# Altium PCB CEM3340_vco.PcbDoc (part 1 of 2)
Units mm, origin at the board's own origin, x right, y up, seen from the top; angles counter-clockwise.
Board outline 94 x 100 mm, 2 copper layers (Top Layer, Bottom Layer), stack 1.584 mm thick; 145 components, 81 nets, 415 pads, 466 vias.
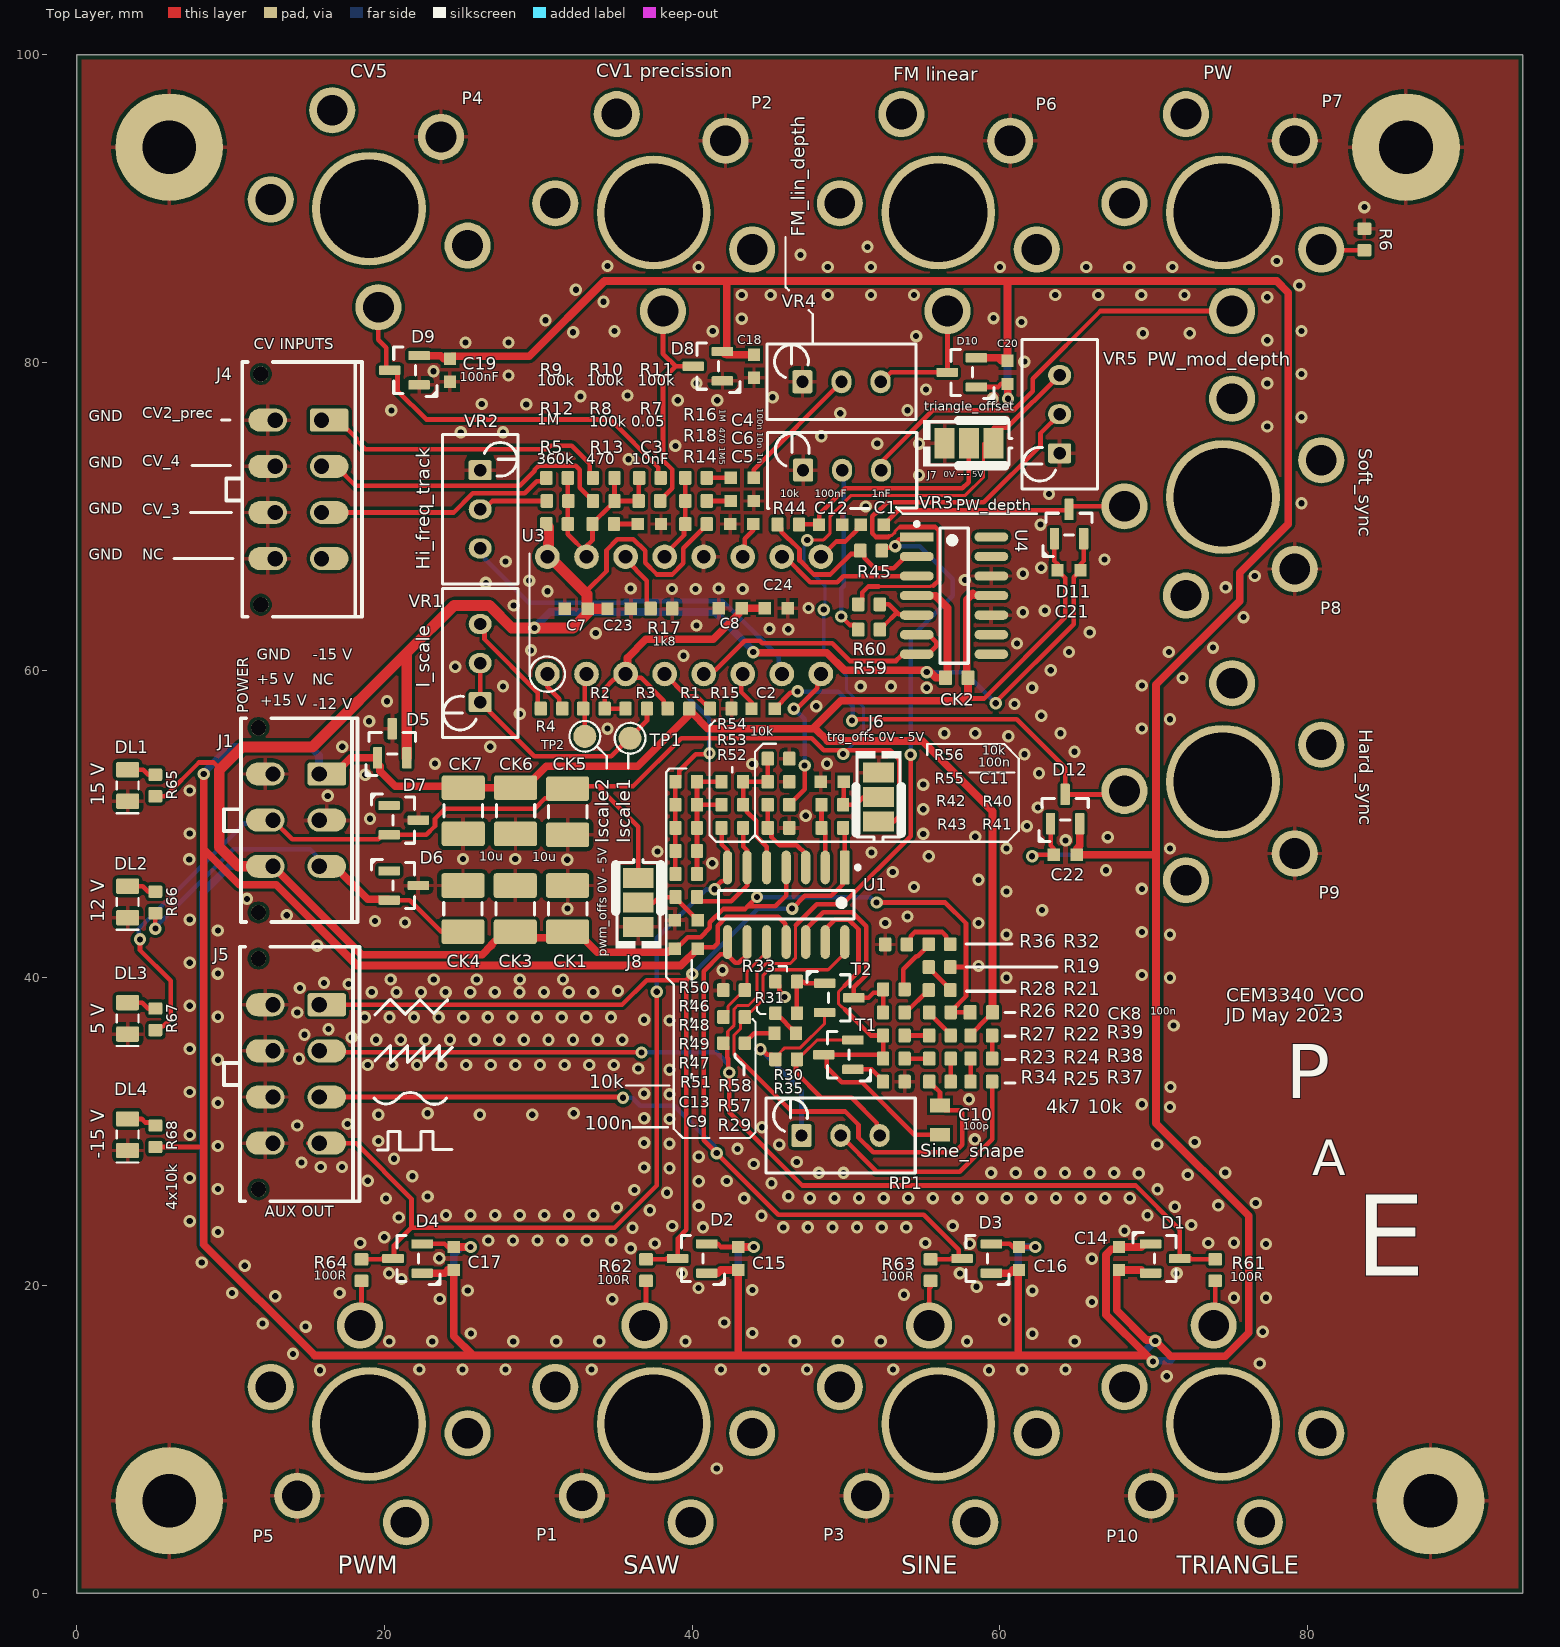
[diagram p0: Top Layer view]
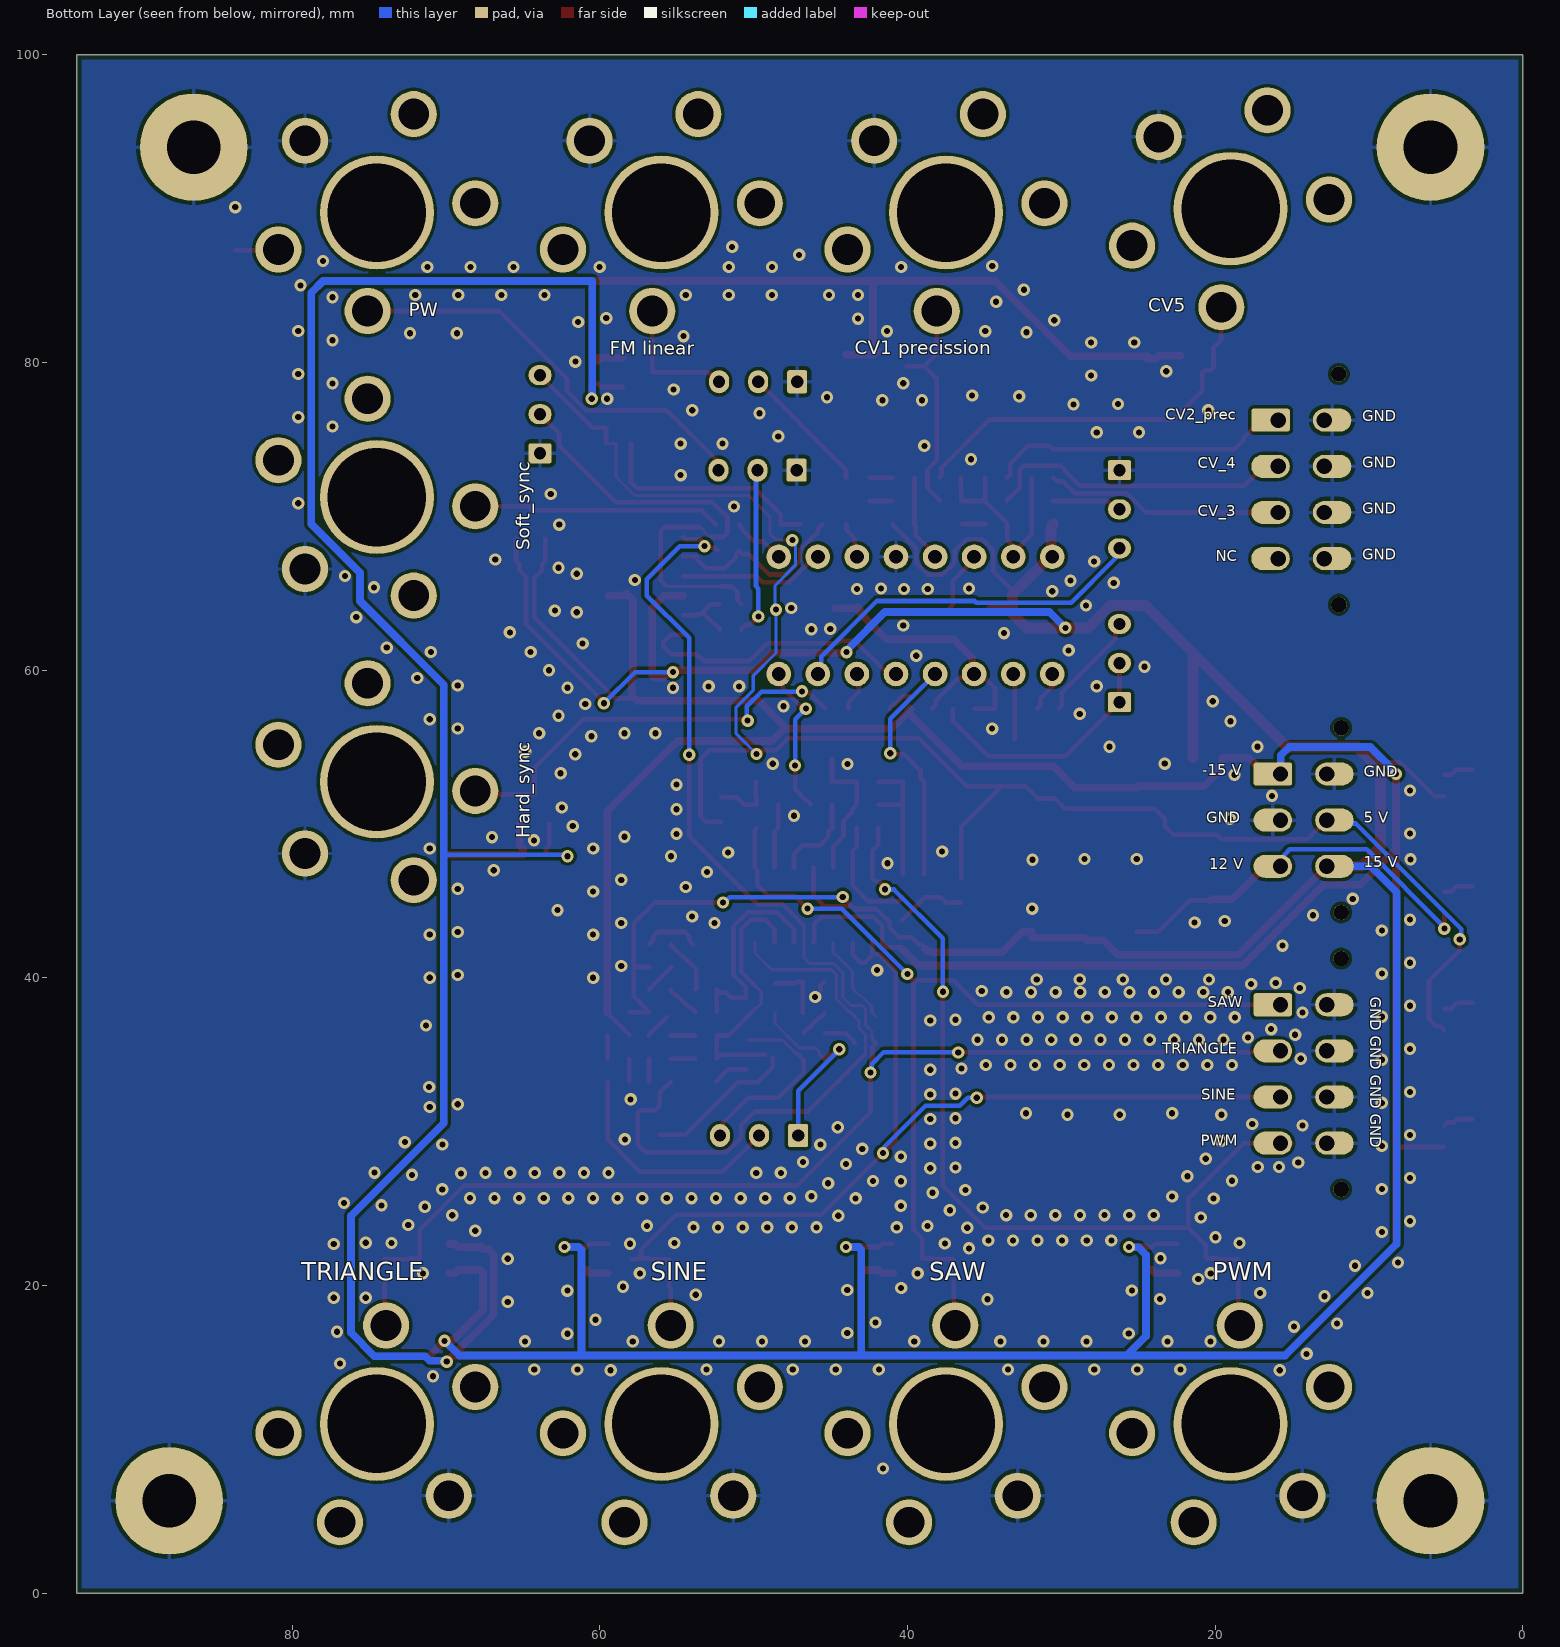
[diagram p1: Bottom Layer view, seen from below]

## Layer stack, top to bottom
Top Solder Mask: solder mask 0.005, Solder Resist, Dk 3.5
Top Layer: signal copper 0.035
Dielectric 1: core 1.514, FR-4, Dk 4.2
Bottom Layer: signal copper 0.035
Botom Solder Mask: solder mask 0.005, Solder Resist, Dk 3.5

## Board outline
0,0 0,100 94,100 94,0

## Design rules (kind name [scope] priority, off if disabled: settings)
AssemblyTestPointUsage [All] p1 off:
AssemblyTestpoint [All] p1 off: testpointundercomponent=TRUE minsize=1.016 maxsize=2.54 preferedsize=1.524 minholesize=0 maxholesize=1.016 preferedholesize=0.813 testpointgrid=0.025 usegrid=TRUE gridtolerance=0 allowsidetop=TRUE allowsidebottom=TRUE
BoardOutlineClearance X_BoardOutlineClearance [HasFootprint('MOUSE_BITES_3X_2_4MM') or  HasFootprint('MOUSE_BITES_5X_2_4MM') or HasFootprint('IN_TAB_2_4_EXT')] p1: gap=0 ignorepadtopadclearanceinfootprint=FALSE // Excluded components
BoardOutlineClearance [All] p2: gap=0.3 ignorepadtopadclearanceinfootprint=FALSE
Clearance "NPT Hole" [(InPadClass('NPTH'))] p1: gap=0.3 ignorepadtopadclearanceinfootprint=FALSE except(0: Arc-Hole Track-Hole SMDPad-Hole THPad-Hole Via-Hole Fill-Hole Poly-Hole Region-Hole Text-Hole) // Copper Clearance to NPT Hole
Clearance [All] p2: gap=0.2 ignorepadtopadclearanceinfootprint=FALSE except(0: Arc-Hole Track-Hole SMDPad-Hole THPad-Hole Via-Hole Fill-Hole Poly-Hole Region-Hole Text-Hole)
ComponentClearance [Not (HasFootprint('PASTE_STENCIL')) vs Not (HasFootprint('PASTE_STENCIL'))] p1: gap=0 collisioncheckmode=3 verticalgap=0.01 showdistances=TRUE
FabricationTestPointUsage [All] p1 off: valid=0 allowmultiple=FALSE
FabricationTestpoint [All] p1 off: side=3 testpointundercomponent=TRUE minsize=1.016 maxsize=2.54 preferedsize=1.524 minholesize=0 maxholesize=1.016 preferedholesize=0.813 testpointgrid=0.025 allowsidetop=TRUE allowsidebottom=TRUE usegrid=TRUE gridtolerance=0
Height [All] p1: minheight=0 maxheight=50 prefheight=12.7
HoleSize [All] p1: absolutevalues=TRUE maxlimit=6.5 minlimit=0.35 maxpercent=80.000 minpercent=20.000
HoleToHoleClearance [All] p1: gap=0.25 allowstackedmicrovias=TRUE
MinimumAnnularRing [All] p1: minimumring=0.2
MinimumSolderMaskSliver [All] p1: minsoldermaskwidth=0.07
PlaneClearance [All] p1: clearance=0.15
PlaneConnect [All] p1: planeconnectstyle=Relief reliefexpansion=0.5 reliefentries=4 reliefconductorwidth=0.25 reliefairgap=0.25
PolygonConnect "Via Connect" [IsVia] p1: connectstyle=Direct reliefconductorwidth=0.254 reliefentries=4 polygonreliefangle="90 Angle" airgapwidth=0.254 // Via connection style
PolygonConnect [All] p2: connectstyle=Relief reliefconductorwidth=0.25 reliefentries=4 polygonreliefangle="90 Angle" airgapwidth=0.25
RoutingCorners [All] p1: cornerstyle=45-Degree minsetback=2.5 maxsetback=2.5
RoutingVias [All] p1: holewidth=0.4 width=0.8 viastyle="Through Hole" minholewidth=0.2 minwidth=0.6 maxholewidth=1 maxwidth=1.6 useviatemplates=TRUE viatemplateguid#1={26E1B80A-D5C0-4505-9623-F9CB59458B7C} viatemplateguid#2={36E1CC21-96E2-49A4-88B6-F2B68A4AE673} viatemplateguid#3={0111366E-BFF6-48C7-B537-6C96D691991D} viatemplateguid#4={0E0C0ADB-85E7-4A3B-837A-9DB01CC425C1} viatemplateguid#5={2AE59D33-7222-4D26-9EBE-4F327D78EEDC} viatemplateguid#6={04F958C5-3098-48F3-841F-9266846BFB57} viatemplateguid#7={3EBD0A92-59C6-4A03-9F1B-9C85124118A6} viatemplateguid#8={D374DE30-929E-4757-A35D-CCDF97954E77} viatemplateguid#9={7387BB7D-B2C7-482F-BFEA-A07FA82CF54E} viatemplatename#1=v50h15m22 viatemplatename#2=v60h20m28 viatemplatename#3=v80h40m48 viatemplatename#4=v110h70m78 viatemplatename#5=v140h90 viatemplatename#6=v160h100m108 viatemplatename#7=v170h110 viatemplatename#8=v200h130 viatemplatename#9=v260h150
SMDEntry [All] p1: side=TRUE corner=FALSE anyangle=FALSE
SMDEntry ResistorArray_Exit [HasFootprint('CAC-50P200X100-8M')] p2: side=TRUE corner=FALSE anyangle=FALSE
SMDToCorner ResistorArray_NeckDown [HasFootprint('CAC-50P200X100-8M')] p1: distance=78740
SilkToSilkClearance [All] p1: silktosilkclearance=0.1
SilkToSolderMaskClearance [IsPad] p1: minsilkscreentomaskgap=0.1 clearancetoexposedcopper=FALSE
SolderMaskExpansion "PTH Via" [IsVia] p1: expansion=0.075 istentingtop=FALSE soldermaskfromhole=TRUE
SolderMaskExpansion [All] p2: expansion=0.1 istentingtop=FALSE
Width [All] p1: maxlimit=5 minlimit=0.15 preferedwidth=0.3
16 further rules are at their usual default settings.

## Classes and differential pairs
component class U_triangle2sine: C10 CK8 R19 R20 R21 R22 R23 R24 R25 R26 R27 R28 R29 R30 R31 R32 R33 R34 R35 R36 R37 R38 R39 RP1 T1 T2
component class U_output_gains: C9 C11 C12 C13 J6 J7 J8 R40 R41 R42 R43 R44 R45 R46 R47 R48 R49 R50 R51 R52 R53 R54 R55 R56 U1
component class main: C14 C15 C16 C17 C18 C19 C20 C21 C22 CK1 CK2 CK3 CK4 CK5 CK6 CK7 D1 D2 D3 D4 D5 D6 D7 D8 D9 D10 D11 D12 DL1 DL2 DL3 DL4 J1 J4 J5 P1 P2 P3 P4 P5 P6 P7 P8 P9 P10 R6 R57 R58 R59 R60 R61 R62 R63 R64 R65 R66 R67 R68 U4 VR3 VR4 VR5
component class U_VCO_core: C1 C2 C3 C4 C5 C6 C7 C8 C23 C24 R1 R2 R3 R4 R5 R7 R8 R9 R10 R11 R12 R13 R14 R15 R16 R17 R18 TP1 TP2 U3 VR1 VR2

## Components (designator, comment, footprint, x,y, rotation, side; value= is the part's Value field where it differs from the comment)
C1 "1nF" WCAP-CSGP_0603_L1.6W0.8H0.8_Reflow 51.702,69.45 r180 top
C2 "1nF" WCAP-CSGP_0603_L1.6W0.8H0.8_Reflow 44.61,57.5 r180 top
C3 "10nF" WCAP-CSGP_0603_L1.6W0.8H0.8_Reflow 37.22,69.5 r0 top
C4 "100nF" WCAP-CSGP_0603_L1.6W0.8H0.8_Reflow 43.25,72.5 r180 top
C5 "1nF" WCAP-CSGP_0603_L1.6W0.8H0.8_Reflow 43.22,69.5 r0 top
C6 "10nF" WCAP-CSGP_0603_L1.6W0.8H0.8_Reflow 43.25,71 r180 top
C7 "100nF" WCAP-CSGP_0603_L1.6W0.8H0.8_Reflow 32.47,64 r0 top
C8 "100nF" WCAP-CSGP_0603_L1.6W0.8H0.8_Reflow 42.47,64.026 r180 top
C9 "100nF" WCAP-CSGP_0603_L1.6W0.8H0.8_Reflow 39.61,41.9 r180 top
C10 "100pF, 50V" WCAP-CSGP_0805_L2W1.25H0.6_Reflow 56.11,30.75 r90 top
C11 "100nF" WCAP-CSGP_0603_L1.6W0.8H0.8_Reflow 49.11,52.75 r0 top
C12 "100nF" WCAP-CSGP_0603_L1.6W0.8H0.8_Reflow 49,69.45 r180 top
C13 "100nF" WCAP-CSGP_0603_L1.6W0.8H0.8_Reflow 39.61,43.75 r0 top
C14 "100nF" WCAP-CSGP_0603_L1.6W0.8H0.8_Reflow 67.75,21.75 r270 top
C15 "100nF" WCAP-CSGP_0603_L1.6W0.8H0.8_Reflow 43,21.75 r90 top
C16 "100nF" WCAP-CSGP_0603_L1.6W0.8H0.8_Reflow 61.25,21.75 r90 top
C17 "100nF" WCAP-CSGP_0603_L1.6W0.8H0.8_Reflow 24.5,21.75 r90 top
C18 "100nF" WCAP-CSGP_0603_L1.6W0.8H0.8_Reflow 44.02,79.762 r90 top
C19 "100nF" WCAP-CSGP_0603_L1.6W0.8H0.8_Reflow 24.25,79.5 r90 top
C20 "100nF" WCAP-CSGP_0603_L1.6W0.8H0.8_Reflow 60.5,79.359 r90 top
C21 "100nF" WCAP-CSGP_0603_L1.6W0.8H0.8_Reflow 64.5,66.5 r0 top
C22 "100nF" WCAP-CSGP_0603_L1.6W0.8H0.8_Reflow 64.25,48 r0 top
C23 "100nF" WCAP-CSGP_0603_L1.6W0.8H0.8_Reflow 35.25,64 r180 top
C24 "100nF" WCAP-CSGP_0603_L1.6W0.8H0.8_Reflow 45.47,64.026 r0 top
CK1 "10u" CAPC3225X27N(SMC1210) 31.9,44.5 r90 top
CK2 "100n" CAPC1608X09N(SMC0603) 57.201,59.504 r0 top
CK3 "10u" CAPC3225X27N(SMC1210) 28.5,44.5 r90 top
CK4 "10u" CAPC3225X27N(SMC1210) 25.1,44.5 r90 top
CK5 "10u" CAPC3225X27N(SMC1210) 31.9,50.8 r270 top
CK6 "10u" CAPC3225X27N(SMC1210) 28.517,50.859 r270 top
CK7 "10u" CAPC3225X27N(SMC1210) 25.117,50.859 r270 top
CK8 "100n" CAPC1608X09N(SMC0603) 58.8,37.75 r0 top
D1 "BAV99" SOT95P230X110-3N(SOT23) 70.75,21.75 r0 top
D2 "BAV99" SOT95P230X110-3N(SOT23) 40,21.75 r180 top
D3 "BAV99" SOT95P230X110-3N(SOT23) 58.5,21.75 r180 top
D4 "BAV99" SOT95P230X110-3N(SOT23) 21.5,21.75 r180 top
D5 "BAV99" SOT95P230X110-3N(SOT23) 20.5,55.25 r90 top
D6 "BAV99" SOT95P230X110-3N(SOT23) 21.25,46 r0 top
D7 "BAV99" SOT95P230X110-3N(SOT23) 21.25,50.25 r0 top
D8 "BAV99" SOT95P230X110-3N(SOT23) 41.02,79.762 r180 top
D9 "BAV99" SOT95P230X110-3N(SOT23) 21.3,79.5 r180 top
D10 "BAV99" SOT95P230X110-3N(SOT23) 57.531,79.359 r180 top
D11 "BAV99" SOT95P230X110-3N(SOT23) 64.5,69.5 r90 top
D12 "BAV99" SOT95P230X110-3N(SOT23) 64.25,50.97 r90 top
DL1 "SMDGREEN" DIOC2012X12N(SMLED0805)G 3.3,52.5 r90 top
DL2 "SMDGREEN" DIOC2012X12N(SMLED0805)G 3.3,44.933 r90 top
DL3 "SMDGREEN" DIOC2012X12N(SMLED0805)G 3.3,37.367 r90 top
DL4 "SMDGREEN" DIOC2012X12N(SMLED0805)G 3.3,29.8 r90 top
J1 "W4230-06PDSTB0R" W4230-06PDS 14.25,50.25 r90 top
J4 "W4230-08PDSGB0R" W4230-08PDS 14.4,71.753 r90 top
J5 "W4230-08PDSGB0R" W4230-08PDS 14.25,33.75 r90 top
J6 "Value" JUMPER3_SMT_1LAYER 52.11,51.75 r270 top
J7 "Value" JUMPER3_SMT_1LAYER 58,74.75 r0 top
J8 "Value" JUMPER3_SMT_1LAYER 36.5,44.9 r90 top
P1 "NYS232" NYS232 37.5,11 r270 top
P2 "NYS232" NYS232 37.5,89.75 r90 top
P3 "NYS232" NYS232 56,11 r270 top
P4 "NYS232" NYS232 19,90 r90 top
P5 "NYS232" NYS232 19,11 r270 top
P6 "NYS232" NYS232 56,89.75 r90 top
P7 "NYS232" NYS232 74.5,89.75 r90 top
P8 "NYS232" NYS232 74.5,71.25 r0 top
P9 "NYS232" NYS232 74.5,52.75 r0 top
P10 "NYS232" NYS232 74.5,11 r270 top
R1 "820" RESC1608X06N(SMR0603) 39.11,57.5 r180 top
R2 "5k6" RESC1608X06N(SMR0603) 33.61,57.5 r0 top
R3 "5k6" RESC1608X06N(SMR0603) 36.36,57.5 r180 top
R4 "18k" RESC1608X06N(SMR0603) 30.86,57.5 r0 top
R5 "360k" RESC1608X06N(SMR0603) 31.22,69.5 r0 top
R6 "10k" RESC1608X06N(SMR0603) 83.7,88 r270 top
R7 "100k 0.05" RESC1608X06N(SMR0603) 37.22,71 r180 top
R8 "100k 0.05" RESC1608X06N(SMR0603) 34.25,72.5 r0 top
R9 "100k" RESC1608X06N(SMR0603) 31.22,72.5 r0 top
R10 "100k" RESC1608X06N(SMR0603) 34.25,71 r0 top
R11 "100k" RESC1608X06N(SMR0603) 37.25,72.5 r180 top
R12 "1M" RESC1608X06N(SMR0603) 31.25,71 r180 top
R13 "470" RESC1608X06N(SMR0603) 34.22,69.5 r0 top
R14 "1M5" RESC1608X06N(SMR0603) 40.25,69.5 r0 top
R15 "51k" RESC1608X06N(SMR0603) 41.86,57.5 r180 top
R16 "1M" RESC1608X06N(SMR0603) 40.25,72.5 r0 top
R17 "1k8" RESC1608X06N(SMR0603) 38,64 r180 top
R18 "470" RESC1608X06N(SMR0603) 40.25,71 r180 top
R19 "4k7" RESC1608X06N(SMR0603) 56.08,40.7 r0 top
R20 "4k7" RESC1608X06N(SMR0603) 56.11,37.75 r0 top
R21 "4k7" RESC1608X06N(SMR0603) 56.08,39.205 r0 top
R22 "4k7" RESC1608X06N(SMR0603) 56.11,36.25 r0 top
R23 "4k7" RESC1608X06N(SMR0603) 53.11,34.75 r180 top
R24 "4k7" RESC1608X06N(SMR0603) 56.11,34.75 r180 top
R25 "4k7" RESC1608X06N(SMR0603) 56.11,33.25 r0 top
R26 "4k7" RESC1608X06N(SMR0603) 53.11,37.75 r0 top
R27 "4k7" RESC1608X06N(SMR0603) 53.11,36.25 r0 top
R28 "4k7" RESC1608X06N(SMR0603) 53.11,39.25 r0 top
R29 "330" RESC1608X06N(SMR0603) 42.726,35.75 r0 top
R30 "1k5" RESC1608X06N(SMR0603) 46.053,36.4 r0 top
R31 "2k2" RESC1608X06N(SMR0603) 46.11,37.7 r0 top
R32 "4k7" RESC1608X06N(SMR0603) 56.08,42.18 r0 top
R33 "220R" RESC1608X06N(SMR0603) 46.11,39.75 r0 top
R34 "220R" RESC1608X06N(SMR0603) 53.11,33.25 r180 top
R35 "470" RESC1608X06N(SMR0603) 46.11,34.7 r180 top
R36 "4k7" RESC1608X06N(SMR0603) 53.25,42.168 r180 top
R37 "10k" RESC1608X06N(SMR0603) 58.8,33.25 r0 top
R38 "10k" RESC1608X06N(SMR0603) 58.8,34.75 r180 top
R39 "10k" RESC1608X06N(SMR0603) 58.8,36.25 r0 top
R40 "10k" RESC1608X06N(SMR0603) 49.11,51.25 r0 top
R41 "10k" RESC1608X06N(SMR0603) 49.11,49.75 r180 top
R42 "10k" RESC1608X06N(SMR0603) 45.61,51.25 r0 top
R43 "10k" RESC1608X06N(SMR0603) 45.61,49.75 r180 top
R44 "10k" RESC1608X06N(SMR0603) 46.25,69.475 r0 top
R45 "10k" RESC1608X06N(SMR0603) 51.628,67.775 r180 top
R46 "10k" RESC1608X06N(SMR0603) 39.61,51.25 r0 top
R47 "10k" RESC1608X06N(SMR0603) 39.61,46.75 r0 top
R48 "10k" RESC1608X06N(SMR0603) 39.61,49.75 r0 top
R49 "10k" RESC1608X06N(SMR0603) 39.61,48.25 r0 top
R50 "10k" RESC1608X06N(SMR0603) 39.61,52.75 r0 top
R51 "10k" RESC1608X06N(SMR0603) 39.61,45.25 r180 top
R52 "10k" RESC1608X06N(SMR0603) 42.61,49.75 r0 top
R53 "10k" RESC1608X06N(SMR0603) 42.61,51.25 r0 top
R54 "10k" RESC1608X06N(SMR0603) 42.61,52.75 r0 top
R55 "10k" RESC1608X06N(SMR0603) 45.61,52.75 r0 top
R56 "10k" RESC1608X06N(SMR0603) 45.61,54.25 r0 top
R57 "1k8" RESC1608X06N(SMR0603) 42.726,37.45 r0 top
R58 "4k7" RESC1608X06N(SMR0603) 42.726,39.197 r0 top
R59 "100k" RESC1608X06N(SMR0603) 51.5,62.635 r180 top
R60 "100k" RESC1608X06N(SMR0603) 51.5,64.28 r180 top
R61 "100R" RESC1608X06N(SMR0603) 74,21 r270 top
R62 "100R" RESC1608X06N(SMR0603) 37,21 r270 top
R63 "100R" RESC1608X06N(SMR0603) 55.5,21 r270 top
R64 "100R" RESC1608X06N(SMR0603) 18.5,21 r270 top
R65 "10k" RESC1608X06N(SMR0603) 5.1,52.5 r270 top
R66 "10k" RESC1608X06N(SMR0603) 5.1,44.9 r270 top
R67 "10k" RESC1608X06N(SMR0603) 5.1,37.3 r270 top
R68 "10k" RESC1608X06N(SMR0603) 5.1,29.7 r90 top
RP1 "500R" 64W 49.65,29.75 r0 top
T1 "BC817-40" SOT95P230X110-3N(SOT23) 49.5,35 r180 top
T2 "BC817-40" SOT95P230X110-3N(SOT23) 49.56,38.7 r0 top
TP1 "Iscale1" TP_1.5_SMD_ROUND 35.96,55.575 r180 top
TP2 "Iscale2" TP_1.5_SMD_ROUND 33.02,55.7 r180 top
U1 "OPA4197ID" SOIC127P600X175-14N(SO-14) 46.11,44.75 r270 top
U3 "CEM3340" DIP-16 30.59,59.75 r90 top locked
U4 "OPA4197ID" SOIC127P600X175-14N(SO-14) 57.024,64.848 r0 top
VR1 "10k" 64W 26.22,60.46 r90 top
VR2 "20k" 64W 26.22,70.46 r270 top
VR3 "10k" 64W 49.75,73 r0 top
VR4 "10k" 64W 49.71,78.75 r0 top
VR5 "10k" 64W 63.891,76.64 r90 top

## Footprints (in the part's own frame and the unit in brackets; to place one, negate y for a bottom-side part, rotate by r counter-clockwise, add the part's x,y. Pads: shape width x height; smd on the part's side, far side on the other; paste and mask are expansions set on the pad)
64W [mm] "Multi-Turn Cermet Trimmer, Square 10mm"
  rrect20% 1.3x1.5 hole 0.8: 1(-2.54,0)
  oval 1.3x1.5 hole 0.8: 2(0,0) 3(2.54,0)
  silkscreen extent -4.85,-2.45 4.85,2.45, body extent -4.85,-2.5 4.85,2.5, height 11.1
CAPC1608X09N(SMC0603) [mm] "Chip Capacitor, 2-Leads, Body 1,60x0,80mm, IPC Medium Density"
  rrect20% 0.85x0.95 smd: 1(-0.725,0) 2(0.725,0)
  body extent -0.85,-0.45 0.85,0.45, height 0.9
CAPC3225X27N(SMC1210) [mm] "Chip Capacitor, 2-Leads, Body 3,20x2,50mm, IPC Medium Density"
  rrect20% 1.6x2.8 smd: 1(-1.5,0) 2(1.5,0)
  silkscreen extent -0.4,-1.25 0.4,1.25, body extent -1.65,-1.35 1.65,1.35, height 2.7
DIOC2012X12N(SMLED0805)G [mm] "Chip LED, 2-Leads, Body 2,00x1,25mm, IPC Medium Density"
  rrect20% 1x1.5 smd: 1(-1.025,0) 2(1.025,0)
  silkscreen extent -1.8,-0.7 0.25,0.7, body extent -1.1,-0.72 1.1,0.73, height 1.1
DIP-16 [mm] "universal DIP-16 footprint"
  round 1.6 hole 0.9: 1(0,0) 2(0,-2.54) 3(0,-5.08) 4(0,-7.62) 5(0,-10.16) 6(0,-12.7) 7(0,-15.24) 8(0,-17.78) 9(7.62,-17.78) 10(7.62,-15.24) 11(7.62,-12.7) 12(7.62,-10.16) 13(7.62,-7.62) 14(7.62,-5.08) 15(7.62,-2.54) 16(7.62,0)
  body extent 0,-18.87 7.87,1.09, height 4.7
JUMPER3_SMT_1LAYER [mm] "Soldering jumper, 3Way 1 layer"
  rect 1.3x2 smd paste-5: 1(-1.6,0) 2(1.6,0) 3(0,0)
  silkscreen extent -3,-1.5 2.8,1.5, body extent -2.2,-1 2.2,1, height 1.5
NYS232 [mm]
  round 3 hole 2: 1(4.67,-4.67) 2(6.4,2.4) 3(0.6,6.4) 4(-6.4,-0.6) 5(-2.4,-6.4)
  round 7.4 hole 6.4: 6(0,0)
  body extent -7.85,-7.85 7.85,7.85, height 31.31
RESC1608X06N(SMR0603) [mm] "Chip Resistor, 2-Leads, Body 1,60x0,80mm, IPC Medium Density"
  rrect20% 0.8x0.9 smd: 1(-0.7,0) 2(0.7,0)
  body extent -0.87,-0.45 0.88,0.45, height 0.55
SOIC127P600X175-14N(SO-14) [mm] "SOIC, 14-Leads, Body 8,65x3,90mm, Pitch 1,27mm, IPC Medium Density"
  rrect20% 2.2x0.6 smd: 1(-2.425,3.81)
  oval 2.2x0.6 smd: 2(-2.425,2.54) 3(-2.425,1.27) 4(-2.425,0) 5(-2.425,-1.27) 6(-2.425,-2.54) 7(-2.425,-3.81) 8(2.425,-3.81) 9(2.425,-2.54) 10(2.425,-1.27) 11(2.425,0) 12(2.425,1.27) 13(2.425,2.54) 14(2.425,3.81)
  silkscreen extent -2.55,-4.4 0.93,4.79, body extent -3,-4.4 3,4.4, height 1.7
SOT95P230X110-3N(SOT23) [mm]
  rrect20% 1.4x0.6 smd: 1(-0.95,0.95) 2(-0.95,-0.95) 3(0.95,0)
  silkscreen extent -2.1,-1.5 0.7,1.7, body extent -1.4,-1.45 1.4,1.45, height 1.3
TP_1.5_SMD_ROUND [mm] "Single layer Testpoint 1.5mm"
  round 1.5 smd paste-5: 1(0,0)
  silkscreen extent -1,-1 1,1, body extent -0.75,-0.75 0.75,0.75, height 0.4
W4230-06PDS [mm] "Micro-Fit 3.0 Header, THT, Dual Row, Vertical, with PCB Polarizing Peg, 6 Circuits, with mate"
  rrect20% 1.5x2.5 hole 1 copper offset 0,-0.5: 1(3,-1.5)
  oval 1.5x2.5 hole 1 copper offset 0,-0.5: 2(0,-1.5) 3(-3,-1.5)
  oval 1.5x2.5 hole 1 copper offset 0,0.5: 4(3,1.5) 5(0,1.5) 6(-3,1.5)
  round 1 hole 1 unplated: #(-6,2.44) #(6,2.44)
  silkscreen extent -6.63,-4 6.63,4.69, body extent -6.57,-4.14 6.58,6.71, height 17.5
W4230-08PDS [mm] "Micro-Fit 3.0 Header, THT, Dual Row, Vertical, with PCB Polarizing Peg, 8 Circuits, with mate"
  rrect20% 1.5x2.5 hole 1 copper offset 0,-0.5: 1(4.5,-1.5)
  oval 1.5x2.5 hole 1 copper offset 0,-0.5: 2(1.5,-1.5) 3(-1.5,-1.5) 4(-4.5,-1.5)
  oval 1.5x2.5 hole 1 copper offset 0,0.5: 5(4.5,1.5) 6(1.5,1.5) 7(-1.5,1.5) 8(-4.5,1.5)
  round 1 hole 1 unplated: #(-7.5,2.44) #(7.5,2.44)
  silkscreen extent -8.27,-4.13 8.28,4.69, body extent -8.07,-4.14 8.08,6.71, height 17.6
WCAP-CSGP_0603_L1.6W0.8H0.8_Reflow [mm] "Ceramic Capacitors, body 1.6x0.8mm"
  rect 0.8x0.8 smd: 1(-0.75,0) 2(0.75,0)
  body extent -0.8,-0.4 0.8,0.4, height 0.8
WCAP-CSGP_0805_L2W1.25H0.6_Reflow [mm] "Ceramic Capacitors, body 2x1.25mm"
  rect 0.9x1.3 smd: 1(-0.95,0) 2(0.95,0)
  body extent -1,-0.63 1,0.63, height 0.6

## Part data
C1 C2 C5: library part 885012006063, "WCAP-CSGP Multilayer Ceramic Chip Capacitor, General Purpose, size 0603, NP0, 1nF, 50V", Capacitance Tolerance=+/-5%, Isolation Resistance=10GOhm, Manufacturer="Wurth Elektronik", Operating Temperature max.=125C, Operating Temperature min.=-55C, Rated Voltage=50V, Capacitance=1nF, Ceramic Type=NP0, ComponentLink1Description="Manufacturer Link", ComponentLink1URL=http://www.we-online.de, ComponentLink2Description=Datasheet, ComponentLink2URL=https://www.we-online.com/catalog/datasheet/885012006063.pdf, Height=0.8mm, Length=1.6mm, Manufacturer Part Number=885012006063, Mounting Technology=SMT, Packaging="Tape and Reel", Q-Factor=1000, Size=0603, Technical Reference=NP00603102J050DFCT10000, Width=0.8mm
C3 C6: library part 885012206089, "WCAP-CSGP Multilayer Ceramic Chip Capacitor, General Purpose, size 0603, X7R, 10nF, 50V", Capacitance Tolerance=+/-10%, Isolation Resistance=10GOhm, Manufacturer="Wurth Elektronik", Operating Temperature max.=125C, Operating Temperature min.=-55C, Rated Voltage=50V, Capacitance=10nF, Ceramic Type=X7R, ComponentLink1Description="Manufacturer Link", ComponentLink1URL=http://www.we-online.de, ComponentLink2Description=Datasheet, ComponentLink2URL=https://www.we-online.com/catalog/datasheet/885012206089.pdf, Dissipation Factor=2.5%, Height=0.8mm, Length=1.6mm, Manufacturer Part Number=885012206089, Mounting Technology=SMT, Packaging="Tape and Reel", Size=0603, Technical Reference=X7R0603103K050DFCT10000, Width=0.8mm
C4 C7 C8 C9 C11 C12 C13 C14 C15 C16 C17 C18 C19 C20 C21 C22 C23 C24: library part 885012206095, "WCAP-CSGP Multilayer Ceramic Chip Capacitor, General Purpose, size 0603, X7R, 100nF, 50V", Capacitance Tolerance=+/-10%, Isolation Resistance=5GOhm, Manufacturer="Wurth Elektronik", Operating Temperature max.=125C, Operating Temperature min.=-55C, Rated Voltage=50V, Capacitance=100nF, Ceramic Type=X7R, ComponentLink1Description="Manufacturer Link", ComponentLink1URL=http://www.we-online.de, ComponentLink2Description=Datasheet, ComponentLink2URL=https://www.we-online.com/catalog/datasheet/885012206095.pdf, Dissipation Factor=3%, Height=0.8mm, Length=1.6mm, Manufacturer Part Number=885012206095, Mounting Technology=SMT, Packaging="Tape and Reel", Size=0603, Technical Reference=X7R0603104K050DFCT10000, Width=0.8mm
C10: library part 885012007057, "WCAP-CSGP Multilayer Ceramic Chip Capacitor, General Purpose, size 0805, NP0, 100pF, 50V", Capacitance=100pF, Capacitance Tolerance=+/-5%, Isolation Resistance=10GOhm, Manufacturer="Wurth Elektronik", Operating Temperature max.=125C, Operating Temperature min.=-55C, Rated Voltage=50V, Ceramic Type=NP0, ComponentLink1Description="Manufacturer Link", ComponentLink1URL=http://www.we-online.de, ComponentLink2Description=Datasheet, ComponentLink2URL=https://www.we-online.com/catalog/datasheet/885012007057.pdf, Height=0.6mm, Length=2mm, Manufacturer Part Number=885012007057, Mounting Technology=SMT, Packaging="Tape and Reel", Q-Factor=1000, Size=0805, Technical Reference=NP00805101J050DFCT10000, Width=1.25mm
CK1 CK3 CK4 CK5 CK6 CK7: library part ECK+10U50VXX0, "C; 10u; 50V; 10%; X7R; ??;", Capacitance_F=1E-5, Dielectric_Type=X7R, Manufacturer="Murata: GRM32ER71H106KA12L;;Samsung Electro-mechanics: CL32B106KBJNNNE", Tolerance_Pct=10, Voltage_Rating_V=50, Component_class=Capacitor, ComponentLink1Description=Helios, ComponentLink1URL=heliosgreen://v1/hegMT/5-MT/Classes(343)/Folders/OpenForm?RecordNumbers=[10658879], ComponentLink2Description=ECK+10U50VXX0_MurataEN100.pdf, ComponentLink2URL=I:\DataSheets\ECK+10U50VXX0_MurataEN100.pdf, ComponentLink3Description=ECK+10U50VXX0_SamsungEN100.pdf, ComponentLink3URL=I:\DataSheets\ECK+10U50VXX0_SamsungEN100.pdf, KK=ECK+10U50VXX0, Note="X7R, 9uF @ 10V, 5uF @ 30V, 2.5uF @ 50V", SMD=1, Status_I=Production, Status_II=Active
CK2 CK8: library part ECK+100N50V0603XXK, "C; 100n; 50V; 10%; X7R; ??;", KK=ECK+100N50V0603XXK
DL1 DL2 DL3 DL4: library part EDL+SMDGREENXX1, "Ind; Light; Green;", Manufacturer="KINGBRIGHT: KP-2012MGC", Component_class=Indicator, ComponentLink1Description=Helios, ComponentLink1URL=heliosgreen://v1/hegMT/5-MT/Classes(343)/Folders/OpenForm?RecordNumbers=[380589], ComponentLink2Description=EDL+SMDGREENXX1_KingBright.pdf, ComponentLink2URL=i:\datasheets\EDL+SMDGREENXX1_KingBright.pdf, Indicator_Output=Green, Indicator_Type=Light, KK=EDL+SMDGREENXX1, Note="568nm dominant", SMD=1, Status_I=Production, Status_II=Active
J1: library part EJ-W4230-06PDSTB0RXX0, "Con; Micro Fit 3.0; 6x; PCB; Straight; 250V; 5A; Male; Tin; ??;", Current_Rating_A=5, Manufacturer="HSUAN MAO: W4230-06PDSTB0R;;HSUAN MAO: W4230-06PDSTB0N;;HSM: W4230-06PDSTB0R;;HSM: W4230-06PDSTB0N", Voltage_Rating_V=250, Angle=Straight, Component_class=Connector, ComponentLink1Description=Helios, ComponentLink1URL=heliosgreen://v1/hegMT/5-MT/Classes(343)/Folders/OpenForm?RecordNumbers=[6765380], ComponentLink2Description=EJ-W4230-XXPDSXB0RXX0_HsuanMao.pdf, ComponentLink2URL=i:\datasheets\EJ-W4230-XXPDSXB0RXX0_HsuanMao.pdf, ComponentLink3Description=EJ-W4230-XXPDSTB0NXX0_HsuanMaoEN100.pdf, ComponentLink3URL=I:\datasheets\EJ-W4230-XXPDSTB0NXX0_HsuanMaoEN100.pdf, Connector_Family="Micro Fit 3.0", Gender=Male, KK=EJ-W4230-06PDSTB0RXX0, Mounting_Style=PCB, Multiplicity=6, Plating=Tin, SMD=0, Status_I=Production, Status_II=Active, System=Connector
J4 J5: library part EJ-W4230-08PDSGB0RXX0, "Con; Micro Fit 3.0; 8x; PCB; Straight; 250V; 5A; Male; Gold; ??;", KK=EJ-W4230-08PDSGB0RXX0
J6 J7 J8: library part 000-JUMP3P100, "De; Soldering Jumper;", Component_class="Design Entity", ComponentLink1Description=Helios, ComponentLink1URL=heliosgreen://v1/hegMT/5-MT/Classes(343)/Folders/OpenForm?RecordNumbers=[12022176], Entity_Type="Soldering Jumper", KK=000-JUMP3P100, SMD=0, Status_I=Development, Status_II=Testing
P1 P2 P3 P4 P5 P6 P7 P8 P9 P10: "6.3 mm jack, right angle, THT"
R1 R2 R3 R4 R5 R6 R9 R10 R11 R12 R13 R14 R15 R16 R17 R18 R19 R20 R21 R22 R23 R24 R25 R26 R27 R28 R29 R30 R31 R32 R33 R34 R35 R36 R37 R38 R39 R40 R41 R42 R43 R44 R45 R46 R47 R48 R49 R50 R51 R52 R53 R54 R55 R56 R57 R58 R59 R60 R61 R62 R63 R64 R65 R66 R67 R68: library part "R 0603 universal", "Thick Film resistor, 0603 Size, universal value, 0.1 W", Package=0603, Tolerance & Rating=1%/0.1W, ComponentLink1Description=ER+xxxx0.1W0603XXx_YageoEN100.pdf, ComponentLink1URL=i:\DataSheets\ER+xxxx0.1W0603XXx_YageoEN100.pdf, ComponentLink3Description="rezistor čip", ComponentLink3URL=heliosgreen://v1/hegMT/5-MT/Classes(343)/Folders/OpenForm?RecordNumbers=[6094847], consumption=0, RPP=0,0188, SMD=1
R7 R8: library part "R 0603 universal", "Precision Thick Film resistor, 0603 Size, universal value, 0.1 W", Package=0603, Tolerance & Rating=0,05%/0.1W, ComponentLink1Description=ER+xxxx0.1W0603XXx_YageoEN100.pdf, ComponentLink1URL=i:\DataSheets\ER+xxxx0.1W0603XXx_YageoEN100.pdf, ComponentLink3Description="rezistor čip", ComponentLink3URL=heliosgreen://v1/hegMT/5-MT/Classes(343)/Folders/OpenForm?RecordNumbers=[6094847], consumption=0, RPP=0,0188, SMD=1
RP1: library part ERP-500R0.5XX0, "R; 500R; 0.5W; 10%; 250V; Variable; ±100ppm/K; 1x;", Manufacturer="VISHAY: T93YA501KT20", Power_Rating_W=0.5, Resistance_Ohm=500, Resistor_Type=Variable, Temperature_Coefficient_PPMpK=±100, Tolerance_Pct=10, Voltage_Rating_V=250, Component_class=Resistor, ComponentLink1Description=Helios, ComponentLink1URL=heliosgreen://v1/hegMT/5-MT/Classes(343)/Folders/OpenForm?RecordNumbers=[7436732], ComponentLink2Description=ERP-500R0.5XX0_VishayEN100.pdf, ComponentLink2URL=i:\datasheets\ERP-500R0.5XX0_VishayEN100.pdf, KK=ERP-500R0.5XX0, Multiplicity=1, Note="3/8\" Square Multi-Turn Cermet Trimmer", SMD=0, Status_I=Development, Status_II=Active
T1 T2: library part ET+BC817-40XX0, "SSw; NPN; ??Ohm; 45V; 0.5A; 1x;", Current_Rating_A=0.5, Manufacturer="NXP: BC817-40,215;;PHILIPS: BC817-40;;INFINEON: BC817-40;;FAI: BC817-40;;STM: BC817-40;;ONS: BC817-40;;NEXPERIA: BC817-40;;NEXPERIA: BC817-40,235", Voltage_Rating_V=45, Component_class="Semiconductor Switch", ComponentLink1Description=Helios, ComponentLink1URL=heliosgreen://v1/hegMT/5-MT/Classes(343)/Folders/OpenForm?RecordNumbers=[382033], ComponentLink2Description="ET+BC817-40XX0_Philips (NXP).pdf", ComponentLink2URL="i:\datasheets\ET+BC817-40XX0_Philips (NXP).pdf", ComponentLink3Description=ET+BC817-40XX0-a.jpg, ComponentLink3URL=i:\DataSheets\SMD_parts_pictures\ET+BC817-40XX0-a.jpg, ComponentLink4Description=ET+BC817-40XX0_OnsemiEN100.pdf, ComponentLink4URL=I:\datasheets\ET+BC817-40XX0_OnsemiEN100.pdf, ComponentLink5Description=ET+BC817-40XX0_spec_OnsemiEN100.pdf, ComponentLink5URL=I:\datasheets\ET+BC817-40XX0_spec_OnsemiEN100.pdf, KK=ET+BC817-40XX0, Multiplicity=1, Semiconductor_Switch_Type=NPN, SMD=1, Status_I=Production, Status_II=Active
TP1 TP2: library part 000-TPSMT100, "De; Test Point;", KK=000-TPSMT100
U1 U4: library part EU+OPA4197IDRXX0, "IC; Opamp; 4.5V; 36V; 4x;", KK=EU+OPA4197IDRXX0
U3: "ALFA RPAR AS3340 VCO (CEM3340)"
VR1 VR2 VR3 VR4 VR5: library part "Trimmer universal 3/8 (10mm)", "093 - 3/8\" Square (10 mm) Multi-Turn Cermet Trimmer", ComponentLink1Description=Datasheet, KK=ERP-10K0.5WXX0, SMD=0
D1 D2 D3 D4 D5 D6 D7 D8 D9 D10 D11 D12: ComponentLink1Description="New link", ComponentLink1URL=C:\Users\Public\Documents\Altium\DSH\EDD+BAV99XX0_OnsemiEN100.PDF

## Free pads (board coordinates)
  round 7 hole 3.5: 2(6,94) 2(6,6) 2(86.4,94) 2(88,6)

## Via types
v1: diameter 0.8, hole 0.4, Top Layer to Bottom Layer, 466 vias

## Nets (pads, with @x,y where several pads share a name; then routed paths per layer and width w, separated by ;. In a path a pad name is that pad's centre, name@x,y a point inside that pad or via, vN(x,y) a via of type N, cw(c..) or ccw(c..) an arc to the next point about the centre after c; other vN are vias at no path point)
+5: CK5.1 D7.2 J1.5 J6.2 J7.2 J8.2 R67.2 VR5.3 | length 116
  Top Layer w0.2: v1(47.485,68.455) 47.5,68.47 48.543,68.47 48.95,68.877 48.95,69.975 50.342,71.367 57.754,71.367 58.95,72.564 58.95,74.75 J7.2@59.6,74.75 ; v1@49.81,54.8 49.815,54.795 v1(49.815,54.55)
  Top Layer w0.3: v1(4.1,42.5) 4.1,41.8 6.1,39.8 6.1,37.326 5.624,36.85 5.35,36.85 R67.2@5.1,36.6 ; J1.5@12.75,50.25 14,49 19.6,49 19.9,49.3 22.71,49.3 23.279,49.869 23.279,50.338 23.938,50.997 29.757,50.997 30.416,51.656 31.516,51.656 32.31,52.45 33.874,52.45 ; J8.2@36.5,46.5 36.5,49.824 33.874,52.45 ; v1@49.81,54.8 48.553,54.8 47.774,55.579 39.283,55.579 36.155,52.45 33.874,52.45 ; v1@49.815,54.8 52.884,54.8 53.434,54.25 53.434,54.171 53.46,54.145 53.46,50.5 53.11,50.15 J6.2@52.11,50.15 ; J7.2@59.6,74.75 59.6,75.75 60.461,75.75 VR5.3@63.891,79.18
  Bottom Layer w0.2: v1(47.485,68.455) 47.485,68.293 47.27,68.077 47.27,66.844 48.621,65.492 48.621,64.005 v1(48.553,63.937) 48.553,61.122 50.031,59.644 50.031,58.7 51.143,57.589 51.143,55.878 v1(49.815,54.55)
  Bottom Layer w0.3: v1(4.1,42.5) 4.014,42.586 4.014,43.174 10.871,50.032 12.032,50.032 J1.5@12.2,50.2
+12: CK4.1 D6.2 J1.3 R66.2 | length 25.7
  Top Layer w0.3: v1(5.1,43.2) R66.2@5.1,44.2 ; D6.2@20.3,45.05 21.65,45.05 23.7,43 CK4.1@25.1,43
  Top Layer w0.5: J1.3@15.75,47.25 16.75,47.25 18.9,45.1 20.25,45.1 D6.2@20.3,45.05
  Bottom Layer w0.3: v1(5.1,43.2) 5.1,43.3 10.15,48.35 15.157,48.35 15.52,47.987 15.52,47.804 15.725,47.6 J1.3@16.1,47.6
+15: C7.2 C9.2 C14.2 C15.2 C16.2 C17.2 C18.2 C19.2 C20.2 C21.2 C22.2 C23.2 CK1.1 CK2.1 CK3.1 CK8.1 D1.2 D2.2 D3.2 D4.2 D5.2 D8.2 D9.2 D10.2 D11.2 D12.2 J1.6 R5.1 R14.2 R19.2 R20.2 R65.2 U1.4 U3.16 U4.4 | length 486.6
  Top Layer w0.3: R65.2@5.1,51.8 5.739,51.8 7.939,54 8.9,54 9.3,53.6 ; D4.2@22.45,22.7 23.9,22.7 24.1,22.5 C17.2@24.5,22.5 ; 33.25,65 33.25,65.25 34.428,66.428 34.428,67.808 35.141,68.52 36.172,68.52 36.94,67.752 36.94,66.991 37.711,66.22 38.704,66.22 39.432,66.948 39.432,67.932 40.7,69.2 40.95,69.45 R14.2@40.95,69.5 ; C9.2@38.86,41.9 39.11,42.15 39.225,42.15 39.725,42.65 40.555,42.65 41.15,43.245 41.15,43.601 42.022,44.474 43.434,44.474 43.61,44.65 ; D2.2@40.95,22.7 41.65,22.7 41.85,22.5 C15.2@43,22.5 ; v1(44.21,45.25) 43.61,44.65 ; U1.4@46.11,47.175 46.11,45.35 45.41,44.65 43.61,44.65 ; v1(51.992,44.893) 56.45,44.893 57.8,43.543 57.8,40.7 ; R19.2@56.78,40.7 57.8,40.7 ; CK8.1@58.075,37.75 R20.2@56.81,37.75 56.81,37.8 57.8,38.79 57.8,40.7 ; D3.2@59.45,22.7 60.65,22.7 60.85,22.5 C16.2@61.25,22.5 v1(62.3,22.5) ; v1(59.739,57.85) 59.739,57.929 64.8,62.99 64.8,66.05 C21.2@65.25,66.5 65.25,66.9 65.45,67.1 D11.2@65.45,68.55
  Top Layer w0.5: J1.6@12.75,47.25 18.5,41.5 26.343,41.5 26.95,42.107 26.95,42.157 27.243,42.45 28.35,42.45 28.5,42.6 CK1.1@31.9,42.6 ; D9.2@22.25,80.45 23.65,80.45 23.85,80.25 C19.2@24.25,80.25 ; C19.2@24.4,80.25 24.4,80.4 29.4,80.4 34.3,85.3 42.25,85.3 ; C17.2@24.5,22.5 24.9,22.5 v1(25.6,22.5) ; CK1.1@31.9,43 32.5,43 33.841,41.659 38.417,41.659 38.508,41.75 38.71,41.75 C9.2@38.86,41.9 ; D8.2@41.97,80.712 42.124,80.558 42.25,80.558 42.25,85.3 ; D8.2@42.25,80.512 C18.2@44.02,80.512 ; C15.2@43,22.5 v1(44,22.5) ; v1(43.97,61.174) 44.007,61.138 48.75,61.138 49.9,59.988 55.363,59.988 55.85,59.5 56.471,59.5 56.6,59.629 56.6,64.045 55.816,64.829 54.618,64.829 U4.4@54.599,64.848 ; D10.2@58.481,80.309 59.9,80.309 ; C20.2@60.5,80.109 60.1,80.109 59.9,80.309 ; C20.2@60.5,80.259 C20.2@60.5,80.309 ; D12.2@65.2,50.02 65.2,48.6 65,48.4 C22.2@65,48 70.07,48 70.15,48.08 ; D1.2@69.8,20.8 69.4,20.8 69.2,21 C14.2@67.75,21 67.6,20.85 67.6,18.39 69.533,16.457 70.043,16.457 v1(70.1,16.4) 71.1,15.4 74.658,15.4 76.174,16.917 76.174,24.526 70.15,30.55 70.15,59.052 75.596,64.498 75.596,66.343 78.759,69.505 78.759,84.541 78,85.3 60.5,85.3 ; 42.25,85.3 60.5,85.3 ; 59.9,80.309 C20.2@60.5,80.309 ; C20.2@60.5,80.309 60.5,85.3
  Top Layer w0.7: 9.25,53.5 9.25,48.5 10.5,47.25 J1.6@12.25,47.25 ; 9.325,53.575 10.75,55 15.31,55 21.45,61.14 ; D5.2@21.45,54.3 21.45,61.14 ; R5.1@30.52,69.5 30.57,69.45 30.57,69.4 30.678,69.292 30.678,68.454 30.652,68.429 30.652,67.432 U3.16@30.59,67.37 30.73,67.37 33.17,64.93 33.17,64.05 C7.2@33.22,64 33.62,64 C23.2@34.5,64 ; C7.2@33.25,63.75 32.25,62.75 v1(29.74,62.75) 28.267,62.75 26.817,64.2 24.51,64.2 21.45,61.14
  Bottom Layer w0.3: v1(44.21,45.25) 51.566,45.25 51.923,44.893 v1(51.992,44.893) ; v1(55.25,59.875) 57.715,59.875 v1(59.739,57.85)
  Bottom Layer w0.5: J1.6@12.75,47.25 9.899,47.25 8.2,45.551 8.2,22.7 15.45,15.45 25.743,15.45 ; v1(25.6,22.5) 25.587,22.487 24.987,22.487 24.5,22 24.5,16.693 25.743,15.45 ; v1(29.74,62.75) 30.775,63.785 41.465,63.785 43.82,61.43 43.82,61.405 43.97,61.255 v1(43.97,61.174) ; v1(44,22.5) 43.176,22.5 43,22.324 43,15.45 ; v1(62.3,22.5) 61.376,22.5 61.2,22.324 61.2,15.45 ; v1(70.1,16.4) 69.15,15.45 61.2,15.45 ; 25.743,15.45 43,15.45 ; 43,15.45 61.2,15.45
-15: C9.1 C14.1 C15.1 C16.1 C17.1 C20.1 C21.1 C22.1 CK2.2 CK6.1 CK7.1 CK8.2 D1.1 D2.1 D3.1 D4.1 D5.1 D10.1 D11.1 D12.1 J1.1 R1.1 R39.1 R68.1 U1.11 U4.11 | length 406.7
  Top Layer w0.3: R68.1@5.1,29 8.1,29 8.2,29.1 ; C9.1@40.36,41.9 40.45,41.99 41.39,41.99 41.65,42.25 41.65,43.394 42.23,43.974 45.586,43.974 46.053,43.507 46.053,42.382 U1.11@46.11,42.325 ; 57.926,58.161 58.989,58.161 64.26,63.432 64.26,65.99 C21.1@63.75,66.5 63.75,66.9 63.55,67.1 D11.1@63.55,68.55 ; R39.1@58.1,36.25 58.1,36.3 59.225,37.425 59.25,37.425 59.525,37.7 CK8.2@59.525,37.75 ; D10.1@58.481,78.409 59.9,78.409 60.1,78.609 C20.1@60.5,78.609 ; v1(62.1,47.905) 62.195,48 C22.1@63.5,48 63.5,48.4 63.3,48.6 D12.1@63.3,50.02
  Top Layer w0.5: v1(8.25,53.25) 8.25,48.369 ; J1.1@15.75,53.25 16.75,53.25 17.8,54.3 D5.1@19.55,54.3 19.55,53.9 19.7,53.75 19.7,53.451 20.701,52.45 25.025,52.45 CK7.1@25.117,52.359 29.117,52.359 30.508,53.75 36.46,53.75 R1.1@39.81,57.1 ; D4.1@22.45,20.8 23.9,20.8 24.1,21 C17.1@24.5,21 24.5,16.7 25.75,15.45 ; R1.1@39.81,57.5 39.96,57.35 39.96,57.26 41.02,56.2 48.002,56.2 48.802,55.4 54.95,55.4 59.525,50.825 CK8.2@59.525,37.75 ; C9.1@40.36,41.9 39.26,40.8 18.21,40.8 12.96,46.05 10.569,46.05 8.25,48.369 ; D2.1@40.95,20.8 41.65,20.8 41.85,21 C15.1@43,21 43,15.45 ; 47.844,56.2 49.654,58.009 57.574,58.009 57.926,58.361 CK2.2@57.926,59.504 ; CK2.2@57.845,59.585 57.845,64.577 58.249,64.981 58.363,64.867 58.603,64.867 58.622,64.848 U4.11@59.449,64.848 ; D3.1@59.45,20.8 60.65,20.8 60.85,21 C16.1@61.25,21 61.2,20.95 61.2,15.45 ; C20.1@60.5,78.609 60.514,78.595 60.514,77.664 v1(60.528,77.65) ; D1.1@69.8,22.7 69.4,22.7 69.2,22.5 C14.1@67.75,22.5 67.6,22.35 67.246,22.35 66.9,22.004 66.9,18.1 69.55,15.45 ; v1(69.951,15.049) 69.55,15.45 ; 8.25,48.369 8.25,22.65 15.45,15.45 25.75,15.45 ; 25.75,15.45 43,15.45 ; 43,15.45 61.2,15.45 ; 61.2,15.45 69.55,15.45
  Bottom Layer w0.3: v1(62.1,47.905) 62.195,48 70.15,48
  Bottom Layer w0.5: v1(8.25,53.25) 8.25,53.331 8.4,53.481 8.4,53.5 9.9,55 15.192,55 15.735,54.457 15.735,53.265 J1.1@15.75,53.25 ; v1(60.528,77.65) 60.5,77.678 60.5,85.3 78,85.3 78.759,84.541 78.759,69.505 75.596,66.343 75.596,64.498 70.15,59.052 70.15,48 70.15,30.55 76.174,24.526 76.174,16.917 74.658,15.4 71.351,15.4 71.057,15.106 70.008,15.106 v1(69.951,15.049)
CV_1_precission: D8.3 P2.4 R7.1 | length 14.8
  Top Layer w0.3: R7.1@37.92,71 37.92,71.05 38.7,71.83 38.7,73.048 38.1,73.648 38.1,78.943 38.92,79.762 ; P2.4@38.1,83.35 38.1,80.582 38.92,79.762 ; D8.3@40.07,79.762 38.92,79.762
CV_2_precission: J4.1 R8.1 | length 19.9
  Top Layer w0.3: J4.1@15.9,76.253 16,76.253 17,76.253 18.177,75.075 18.177,74.93 18.755,74.353 30.548,74.353 30.777,74.582 32.168,74.582 33.33,73.42 33.33,72.72 R8.1@33.55,72.5
CV_3: J4.3 R9.1 | length 15.6
  Top Layer w0.3: J4.3@15.9,70.253 16,70.253 24.499,70.253 25.746,71.5 29.12,71.5 29.9,72.28 30.3,72.28 R9.1@30.52,72.5
CV_4: J4.2 R10.1 | length 20.4
  Top Layer w0.3: J4.2@15.9,73.253 16.86,73.253 18.113,72 28.8,72 29.77,72.97 29.77,73.048 30.022,73.3 32.418,73.3 32.7,73.018 32.7,71.85 33.25,71.3 33.3,71.3 33.55,71.05 R10.1@33.55,71
CV_5: D9.3 P4.4 R11.1 | length 26
  Top Layer w0.3: P4.4@19.6,83.6 19.6,81.481 20.112,80.968 20.112,79.65 20.262,79.5 20.69,79.5 20.84,79.35 20.84,78.16 22.7,76.3 34.666,76.3 37.788,73.178 37.788,72.662 R11.1@37.95,72.5